# Altium PCB Booster_PA_OUT.PcbDoc (part 1 of 2)
Units mil, origin at the board's own origin, x right, y up, seen from the top; angles counter-clockwise.
Board outline 3129.92 x 1141.73 mil, 2 copper layers (Top Layer, Bottom Layer), stack 42.17 mil thick; 98 components, 62 nets, 277 pads, 322 vias.
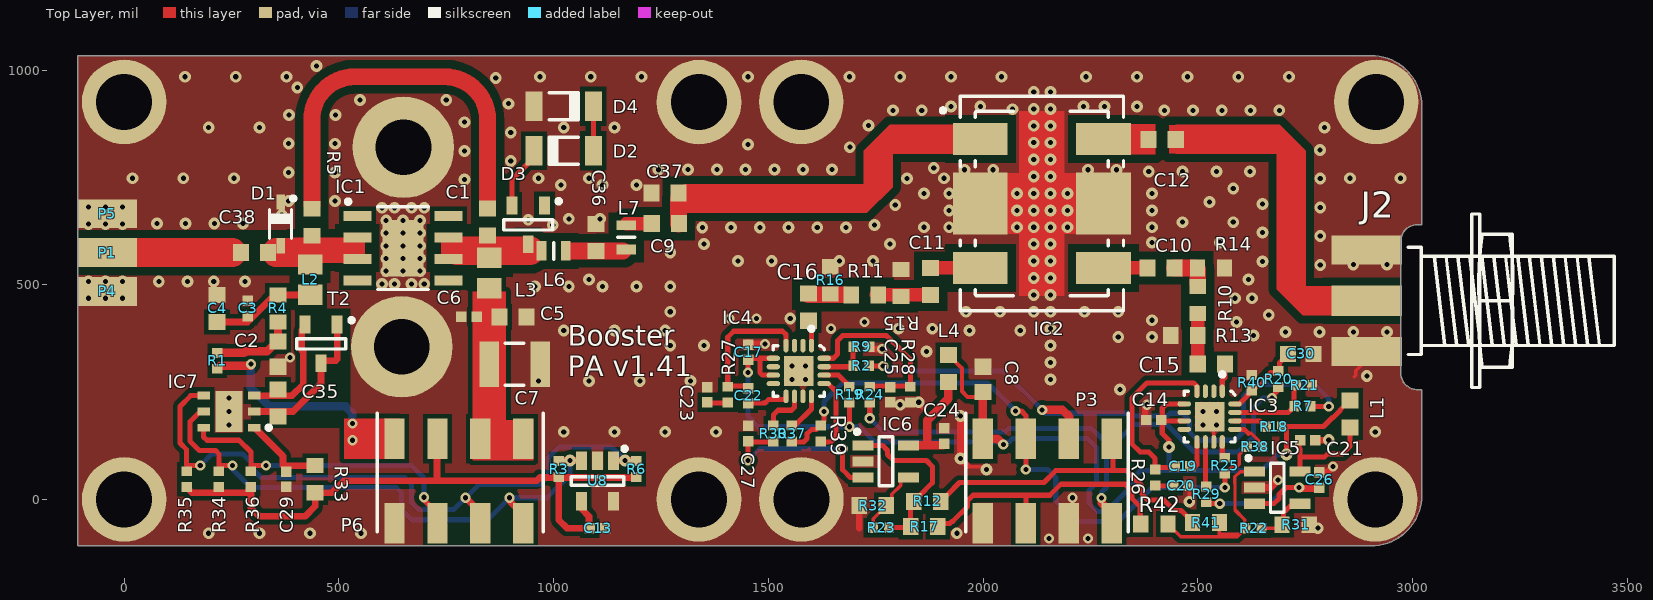
[diagram p0: Top Layer view]
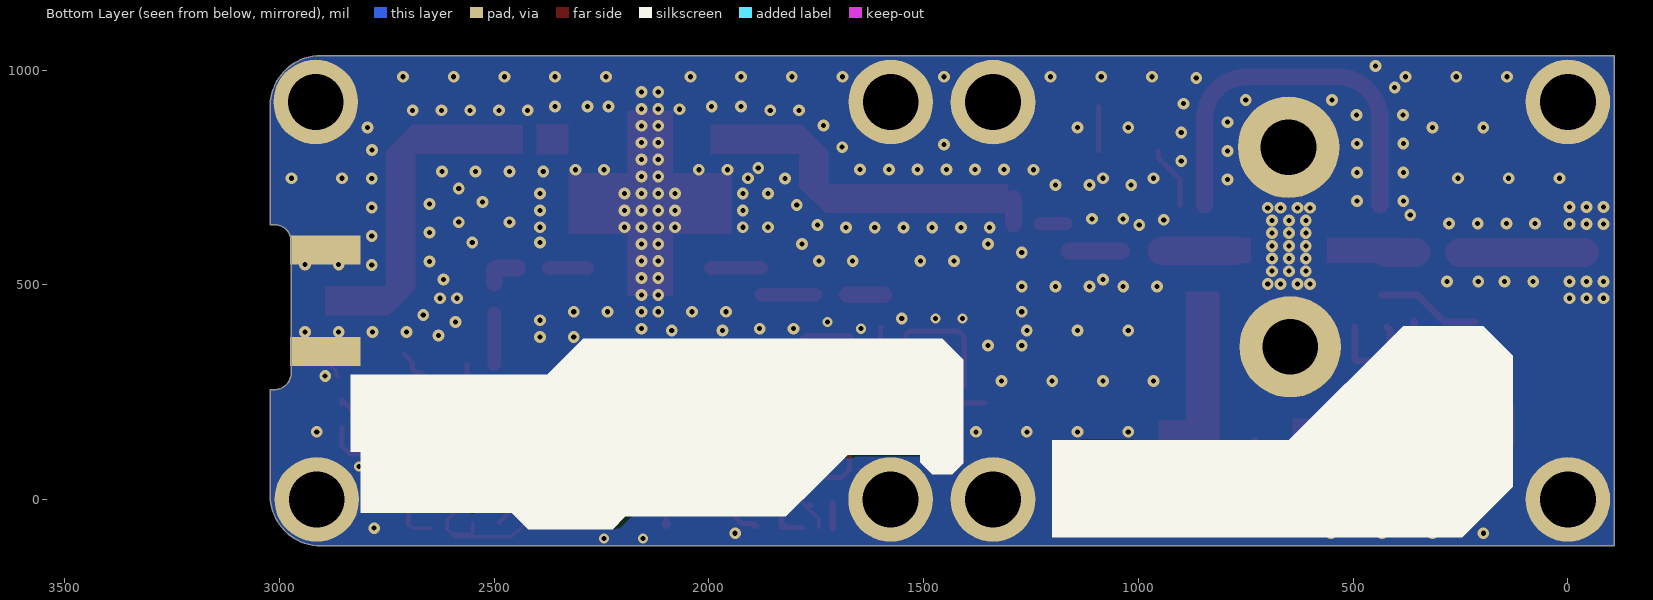
[diagram p1: Bottom Layer view, seen from below]
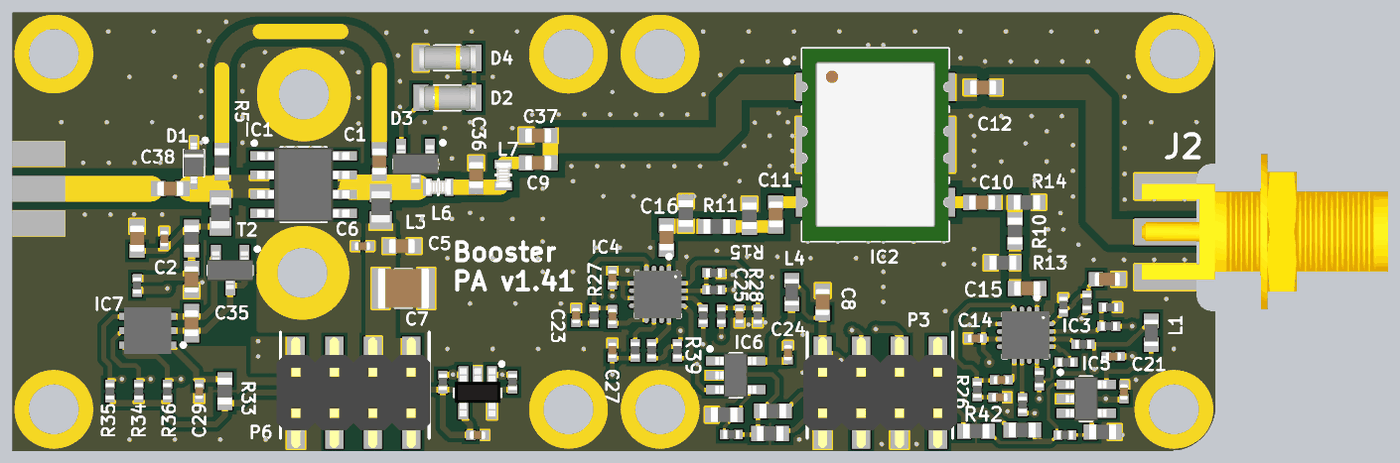
[diagram p2: 3D render of the assembled board from above, using the file's embedded part models]

## Layer stack, top to bottom
Top Solder: solder mask 0.4, Solder Resist, Dk 3.5
Top Layer: signal copper 1.4
Dielectric 1: dielectric 39.37, FR408, Dk 3.67
Bottom Layer: signal copper 1.4
Bottom Solder: solder mask 0.4, Solder Resist, Dk 3.5

## Board outline
-108.27,-108.27 -108.27,1033.46 2903.54,1033.46 cw(c2903.54,915.35) 3021.65,915.35 3021.65,639.76 3011.81,639.76 ccw(c3011.81,600.39) 2972.44,600.39 2972.44,295.28 ccw(c3011.81,295.28) 3011.81,255.91 3021.65,255.91 3021.65,9.84 cw(c2903.54,9.84) 2903.54,-108.27

## Design rules (kind name [scope] priority, off if disabled: settings)
Clearance Clearance_50_Ohm [InNetClass('50_Ohm') vs InNet('GND')] p1: gap=19.68 ignorepadtopadclearanceinfootprint=FALSE except(6: Arc-SMDPad Track-SMDPad SMDPad-SMDPad)
Clearance [All] p2: gap=8 ignorepadtopadclearanceinfootprint=FALSE except(6: Track-Track Track-SMDPad Track-THPad SMDPad-SMDPad SMDPad-THPad SMDPad-Via; 11: Arc-Poly Track-Poly SMDPad-Poly THPad-Poly Via-Poly Fill-Poly Poly-Poly Poly-Region Poly-Text Poly-Hole Region-Region Region-Text Region-Hole)
Height [All] p1: minheight=0 maxheight=1181.1 prefheight=500
HoleSize [All] p1: absolutevalues=TRUE maxlimit=157.48 minlimit=1 maxpercent=80.000 minpercent=20.000
MinimumSolderMaskSliver [All] p1: minsoldermaskwidth=0
PolygonConnect [All] p1: connectstyle=Direct reliefconductorwidth=10 reliefentries=4 polygonreliefangle="90 Angle" airgapwidth=10
RoomDefinition Booster_PA_OUT [InComponentClass('Booster_PA_OUT')] p1 off: confinementstyle=ConfineIn formatcopy=TRUE lockcomponents=FALSE outline 3020.12,1043.31 -3.94,1043.31 -3.94,-88.58 3020.12,-88.58
RoutingVias [All] p1: holewidth=28 width=50 viastyle="Through Hole" minholewidth=28 minwidth=50 maxholewidth=28 maxwidth=50
SilkToSilkClearance [All] p1: silktosilkclearance=0
SolderMaskExpansion [All] p1: expansion=4 istentingtop=FALSE
Width Width_50_Ohm [InNetClass('50_Ohm')] p1: maxlimit=66.93 minlimit=11.81 preferedwidth=66.93 bottomlayer_minwidth=0 bottomlayer_maxwidth=0 bottomlayer_prefwidth=0 minimp=50.000000 maximp=50.000000 favimp=50.000000
Width [All] p2: maxlimit=78.74 minlimit=7.87 preferedwidth=19.68 minimp=50.000000 maximp=50.000000 favimp=50.000000
26 further rules are at their usual default settings.

## Classes and differential pairs
net class 50_Ohm: NetC1_1 NetC1_2 NetC9_1 NetC9_2 NetC10_1 NetC10_2 NetC11_1 NetC11_2 NetC12_1 NetC12_2 NetC15_2 NetC16_2 NetC36_2 NetC38_1 NetC38_2

## Components (designator, comment, footprint, x,y, rotation, side; value= is the part's Value field where it differs from the comment)
C1 "470pF" CAPC1608X87N 846.46,645.67 r270 top
C2 "4.7uF" CAPC1709X95N 358.27,338.58 r90 top
C3 "100nF" CAPC1005X55N 287.4,444.88 r270 top
C4 "680pF" CAPC1608X87N 216.54,444.88 r270 top
C5 "680pF" CAPC1608X87N 905.51,425.2 r180 top
C6 "100nF" CAPC1005X55N 803.15,425.2 r0 top
C7 "4.7uF" CAPC3225X270N 909.45,314.96 r180 top
C8 "4.7uF" CAPC1709X95N 2000,279.53 r270 top
C9 "270pF" CAPC1608X87N 1260.16,642.27 r0 top
C10 "2.2nF" CAPC1608X87N 2414.67,538.98 r180 top
C11 "2.2nF" CAPC1608X87N 1877.95,507.87 r90 top
C12 "2.2nF" CAPC1608X87N 2417.32,838.58 r180 top
C13 "100nF" CAPC1005X55N 1102.36,-66.93 r180 top
C14 "100nF" CAPC1005X55N 2397.64,185.04 r0 top
C15 "2.2nF" CAPC1608X87N 2531.5,314.96 r180 top
C16 "2.2nF" CAPC1608X87N 1593.8,447.66 r90 top
C17 "100nF" CAPC1005X55N 1452.76,342.52 r270 top
C19 "1nF" CAPC1005X55N 2464.57,76.77 r180 top
C20 "100nF" CAPC1005X55N 2460.63,31.5 r0 top
C21 "100nF" CAPC1005X55N 2755.91,137.8 r180 top
C22 "1nF" CAPC1005X55N 1452.98,241.73 r90 top
C23 "100nF" CAPC1005X55N 1358.27,244.09 r90 top
C24 "100nF" CAPC1005X55N 1909.45,147.64 r270 top
C25 "100nF" CAPC1005X55N 1783.46,244.09 r90 top
C26 "10nF" CAPC1005X55N 2783.46,45.5 r270 top
C27 "10nF" CAPC1005X55N 1452.76,153.54 r270 top
C29 "100nF" CAPC1005X55N 377.95,47.24 r90 top
C30 "Undefined" CAPC1608X90N 2740.16,338.96 r180 top
C35 "2.2nF" CAPC1608X87N 358.27,224.41 r90 top
C36 "2.7pF" CAPC1608X87N 1098.43,610.24 r270 top
C37 "0.9pF" CAPC1608X87N 1259.84,713.37 r0 top
C38 "3.3nF" CAPC1608X87N 303.15,574.8 r180 top
D1 "AQ4020-01FTG" SOD2512X110N 364.17,641.73 r270 top
D2 "BZV55-B33" DIOMELF3515N 1023.62,811.61 r0 top
D3 "SZNUP1301ML3T1G" SOT95P240X110-3N 941.02,639.34 r270 top
D4 "BZV55-B33" DIOMELF3515N 1023.62,915.35 r180 top
IC1 "NPTB00004A" SOIC127P610X167-9N-R245X335 649.37,585.24 r0 top
IC2 "SYDC-20-62HP+" MINI-CIRCUITS_AH202-1 2137.1,689.28 r0 top
IC3 "ADL5904ACPZN-R7" QFN50P300X300X80-17N-S175 2527.56,192.91 r270 top
IC4 "ADL5904ACPZN-R7" QFN50P300X300X80-17N-S175 1570.87,299.21 r270 top
IC5 "MCP6291T-E/OT" SOT95P270X145-5N 2685.04,27.56 r0 top
IC6 "MCP6291T-E/OT" SOT95P270X145-5N 1773.62,88.58 r0 top
IC7 "MAX6642ATT94+T" SON95P300X300X80-7N-R160X240 244.09,204.72 r180 top
J2 "SMA" MOLEX_73251-2120 2893.7,462.6 r180 top
L1 "1000R@100MHz" INDC1608X95N 2854.47,199.21 r90 top
L2 "1uH" INDC2113X60N 433.07,511.81 r90 top
L3 "1uH" INDC2113X60N 850.39,527.56 r270 top
L4 "1000R@100MHz" INDC1608X95N 1919.29,305.12 r90 top
L6 "4.7nH" IND_MURATA_LQW18AN_G8 1000,578.74 r0 top
L7 "6.8nH" IND_MURATA_LQW18AN_G8 1169.29,610.24 r90 top
P1 "PAD" PAD_2x3_rect#1 -39.37,501.97 r90 top value=-
P3 "HDR2X4" HDR2X4_SMD 2149.61,43.31 r90 top locked value=-
P4 "PAD" PAD_2x3_rect#2 29.53,452.76 r90 top value=-
P5 "PAD" PAD_2x3_rect#3 88.58,659.45 r90 top value=-
P6 "HDR2X4" HDR2X4_SMD 779.53,43.31 r90 top locked value=-
R1 "0" RESC1005X40N 216.54,322.83 r270 top
R2 "0" RESC1005X40N 1716.54,311.02 r0 top
R3 "10k" RESC1005X40N 1011.81,70.87 r90 top
R4 "39" RESC1608X55N 358.27,444.88 r90 top
R5 "750" RESC1608X55N 437.01,645.67 r90 top
R6 "10k" RESC1005X40N 1192.91,70.87 r90 top
R7 "0" RESC1005X40N 2744.09,216.54 r0 top
R9 "0" RESC1005X40N 1716.95,355.51 r180 top
R10 "71R5" RESC1608X55N 2500,464.57 r90 top
R11 "71R5" RESC1608X55N 1724.41,476.38 r180 top
R12 "Undefined" RESC1608X55N 1870.08,-4.33 r0 top
R13 "46R4" RESC1608X55N 2468.5,381.89 r0 top
R14 "96R5" RESC1608X55N 2530.81,539.37 r180 top
R15 "96R5" RESC1608X55N 1809.44,503.94 r270 top
R16 "46R4" RESC1608X55N 1644.18,510.24 r270 top
R17 "100" RESC1608X55N 1863.06,-63.08 r0 top
R18 "10k" RESC1005X40N 2677.17,169.29 r180 top
R19 "10k" RESC1005X40N 1688.98,244.09 r270 top
R20 "0" RESC1005X40N 2687.01,280.28 r90 top
R21 "0" RESC1005X40N 2747.81,265.75 r180 top
R22 "10k" RESC1005X40N 2629.92,-66.93 r0 top
R23 "10k" RESC1005X40N 1762.46,-65.67 r180 top
R24 "0" RESC1005X40N 1736.22,244.09 r90 top
R25 "0" RESC1005X40N 2562.99,78.74 r90 top
R26 "3R9" RESC1005X40N 2401.57,51.18 r270 top
R27 "3R9" RESC1005X40N 1405.51,244.09 r270 top
R28 "10k" RESC1005X40N 1830.71,244.09 r270 top
R29 "0" RESC1005X40N 2519.68,11.81 r90 top
R30 "0" RESC1005X40N 1511.81,153.54 r90 top
R31 "20k" RESC1608X55N 2728,-59 r180 top
R32 "20k" RESC1608X55N 1743.33,-14.24 r0 top
R33 "39" RESC1608X55N 444.88,47.24 r270 top
R34 "10k" RESC1005X40N 220.47,47.24 r90 top
R35 "10k" RESC1005X40N 145.67,47.24 r90 top
R36 "10k" RESC1005X40N 295.28,47.24 r90 top
R37 "0" RESC1005X40N 1555.12,153.54 r90 top
R38 "0" RESC1005X40N 2633.04,122.42 r0 top
R39 "0" RESC1005X40N 1622.05,153.54 r270 top
R40 "0" RESC1005X40N 2625.98,271.65 r90 top
R41 "100" RESC1608X55N 2519,-54 r0 top
R42 "Undefined" RESC1608X55N 2399,-57 r0 top
T2 "MMBT3906LT1G" SOT95P240X110-3N 458.66,362.2 r270 top
U8 "DNP" SOT23-5_N 1102.36,43.31 r270 top value=24AA01H

## Footprints (in the part's own frame and the unit in brackets; to place one, negate y for a bottom-side part, rotate by r counter-clockwise, add the part's x,y. Pads: shape width x height; smd on the part's side, far side on the other; paste and mask are expansions set on the pad)
CAPC1005X55N [mm] "Capacitor, Non-Polarized, Chip; 1.00mm L X 0.50mm W X 0.70mm H, IPC Medium Density"
  rect 0.62x0.62 smd: 1(-0.45,0) 2(0.45,0)
  body extent -0.52,-0.27 0.53,0.28, height 0.55
CAPC1608X87N [mm] "Chip Capacitor, Body 1.6x0.8mm IPC Medium Density"
  rect 0.95x1 smd: 1(-0.8,0) 2(0.8,0)
  body extent -0.87,-0.47 0.88,0.48, height 0.87
CAPC1608X90N [mm] "Chip Capacitor, Body 1.6x0.8mm IPC Medium Density"
  rect 0.95x0.95 smd: 1(-0.75,0) 2(0.75,0)
  body extent -0.85,-0.45 0.85,0.45, height 0.9
CAPC1709X95N [mm] "Capacitor, non-Polarized, Chip; 1.65mm L X 0.85mm W X 0.95mm H,IPC Medium Density"
  rect 0.95x1 smd: 1(-0.75,0) 2(0.75,0)
  body extent -0.87,-0.47 0.88,0.48, height 0.95
CAPC3225X270N [mm] "Chip Capacitor, Body 3.2x2.5mm, IPC Medium Density"
  rect 1.15x2.7 smd: 1(-1.5,0) 2(1.5,0)
  silkscreen extent -0.55,-1.25 0.55,1.25, body extent -1.7,-1.35 1.7,1.35, height 2.7
DIOMELF3515N [mm] "SOD80C, MELF Diode, 2-Leads, Body 3.5x1.5mm, IPC Medium Density"
  rect 1x1.75 smd: 1(-1.75,0) 2(1.75,0)
  silkscreen extent -0.85,-0.8 0.85,0.8, body extent -1.85,-0.8 1.85,0.8, height 1.6
HDR2X4_SMD [mm]
  rect 2.4x1.2 smd: 1(-2.5,-3.81) 2(2.5,-3.81) 3(-2.5,-1.27) 4(2.5,-1.27) 5(-2.5,1.27) 6(2.5,1.27) 7(-2.5,3.81) 8(2.5,3.81)
  silkscreen extent -3,-4.79 4,4.83, body extent -3.65,-5.08 3.65,5.08, height 9.3
IND_MURATA_LQW18AN_G8 [mm] "SMT inductor 0603, Body Width 0.99mm Body Lenght 1.65mm Height 1mm"
  rect 0.57x1.15 smd: 1(-0.715,0) 2(0.715,0)
  silkscreen extent 0,-0.5 0,0.5, body extent -0.82,-0.49 0.83,0.5, height 1
INDC1608X95N [mm] "Chip Inductor, 2-Leads, EIA 0603, Metric 1608, Body 1.6x0.8mm, IPC Medium Density"
  rect 0.95x1 smd: 1(-0.8,0) 2(0.8,0)
  body extent -0.87,-0.47 0.88,0.48, height 0.95
INDC2113X60N [mm] "Chip Inductor, EIA 0805, Metric 2012, Body 2.1x1.25mm, IPC Medium Density"
  rect 1.2x1.45 smd: 1(-0.9,0) 2(0.9,0)
  body extent -1.05,-0.62 1.05,0.63, height 0.6
MINI-CIRCUITS_AH202-1 [mm] "MINI-CIRCUITS AH202-1 Case, Body 12.7mm L X 9.65mm W X 6.35mm H"
  rect 3.23x1.88 smd: 1(3.643,3.81) 4(3.643,-3.81) 5(-3.643,-3.81) 8(-3.643,3.81)
  rect 3.23x2 smd: 2(3.643,0.83) 3(3.643,-0.83) 6(-3.643,-0.83) 7(-3.643,0.83)
  Top Layer region: -1.335,1.78 -4.825,1.78 -4.825,-1.78 -1.335,-1.78 -1.335,-5.46 1.335,-5.46 1.335,-1.78 4.825,-1.78 4.825,1.78 1.335,1.78 1.335,5.46 -1.335,5.46
  silkscreen extent -5.97,-6.35 4.82,6.35, body extent -4.82,-6.35 4.83,6.35, height 6.35
MOLEX_73251-2120 [mm] "50 Ohm, SMA Edge Mount PCB, With Jam Nut And Lock Washer"
  rect 4.19x1.78 smd: 1(0,0)
  rect 4.19x1.7 smd: 2(0,3) 2(0,-3)
  rect 4.19x1.7 smd far side: 2(0,3) 2(0,-3)
  silkscreen extent -14.64,-5.13 -2.44,5.13, body extent -14.64,-5.13 1.62,5.13, height 5.76
PAD_2x3_rect#1 [mm] "pad pod gniazdka SMA wkrêcane w obudowy"
  rect 1.7x3.5 smd mask+0.03: 1(1.85,0)
PAD_2x3_rect#2 [mm] "pad pod gniazdka SMA wkrêcane w obudowy"
  rect 1.7x3.5 smd mask+0.03: 1(0.8,1.75)
PAD_2x3_rect#3 [mm] "pad pod gniazdka SMA wkrêcane w obudowy"
  rect 1.7x3.5 smd mask+0.03: 1(0.15,3.25)
QFN50P300X300X80-17N-S175 [mm] "QFN, 0.50mm Pitch, Square; 16 Pin, 3.00mm L X 3.00mm W X 0.80mm H Body (w/Thermal Tab 1.75 X 1.75mm),  IPC Medium Density"
  oval 0.8x0.3 smd: 1(-1.5,0.75) 2(-1.5,0.25) 3(-1.5,-0.25) 4(-1.5,-0.75) 9(1.5,-0.75) 10(1.5,-0.25) 11(1.5,0.25) 12(1.5,0.75)
  oval 0.3x0.8 smd: 5(-0.75,-1.5) 6(-0.25,-1.5) 7(0.25,-1.5) 8(0.75,-1.5) 13(0.75,1.5) 14(0.25,1.5) 15(-0.25,1.5) 16(-0.75,1.5)
  rect 1.75x1.75 smd: 17(0,0)
  silkscreen extent -2.62,-1.5 1.5,1.5, body extent -1.57,-1.57 1.58,1.58, height 0.8
RESC1005X40N [mm] "Chip Resistor, EIA 0402, Metric 1005, Body 1.0x0.5mm, IPC Medium Density"
  rect 0.58x0.62 smd: 1(-0.47,0) 2(0.47,0)
  body extent -0.52,-0.27 0.53,0.28, height 0.4
RESC1608X55N [mm] "Chip Resistor, EIA 0603, Metric 1608, Body 1.6x0.8mm, IPC Medium Density"
  rect 0.9x1 smd: 1(-0.8,0) 2(0.8,0)
  body extent -0.87,-0.47 0.88,0.48, height 0.55
SOD2512X110N [mm] "Small Outline Diode (SOD-323), 1.70mm W X 1.25mm L X 1.10mm H body,  IPC Medium Density"
  rect 0.9x0.5 smd: 1(-1.3,0) 2(1.3,0)
  silkscreen extent -1.62,-0.65 0.85,0.88, body extent -1.35,-0.67 1.35,0.68, height 1.1
SOIC127P610X167-9N-R245X335 [mm] "SOIC, 1.27mm pitch; 8 pin, 3.89mm W X 4.90mm L X 1.67mm H body (w/thermal tab 2.45mm X 3.35mm), IPC Medium Density"
  rect 1.65x0.6 smd: 1(-2.7,1.905) 2(-2.7,0.635) 3(-2.7,-0.635) 4(-2.7,-1.905) 5(2.7,-1.905) 6(2.7,-0.635) 7(2.7,0.635) 8(2.7,1.905)
  rect 2.45x3.35 smd: 9(0,0)
  silkscreen extent -3.37,-2.45 1.5,2.87, body extent -3.05,-2.45 3.05,2.45, height 1.67
SON95P300X300X80-7N-R160X240 [mm] "SON, 0.95mm Pitch; 6 Pin, 3.00mm W X 3mm L X 0.80mm H body (w/Thermal Tab 1.6mm x 2.4mm)"
  rect 0.75x0.45 smd: 1(-1.5,0.95) 2(-1.5,0) 3(-1.5,-0.95) 4(1.5,-0.95) 5(1.5,0) 6(1.5,0.95)
  rect 1.6x2.4 smd: 7(0,0)
  silkscreen extent -2.48,0.83 -2.23,1.07, body extent -1.55,-1.55 1.55,1.55, height 0.8
SOT23-5_N [mm] "SOT23, 5-Leads, Body 2.9x1.6mm, Pitch 0.95mm, Lead Span 2.8mm, IPC Medium Density"
  rect 1.1x0.65 smd: 1(-1.2,0.95) 2(-1.2,0) 3(-1.2,-0.95) 4(1.2,-0.95) 5(1.2,0.95)
  silkscreen extent -2.02,-1.55 0.25,1.73, body extent -1.63,-1.5 1.57,1.5, height 1.1
SOT95P240X110-3N [mm] "SOT23 3-Leads, Pitch 0.95mm, Body 1.3x2.9mm, IPC Medium Density"
  rect 1.05x0.65 smd: 1(-1.15,0.95) 2(-1.15,-0.95) 3(1.15,0)
  silkscreen extent -1.52,-1.45 0.3,1.92, body extent -1.25,-1.5 1.25,1.5, height 1.1
SOT95P270X145-5N [mm] "SOT, 0.95mm Pitch; 5 Pin,1.55mm W X 2.90mm L X 1.45mm H body, IPC Medium Density"
  rect 1.25x0.6 smd: 1(-1.35,0.95) 2(-1.35,0) 3(-1.35,-0.95) 4(1.35,-0.95) 5(1.35,0.95)
  silkscreen extent -1.82,-1.45 0.4,1.87, body extent -1.35,-1.45 1.35,1.45, height 1.45

## Part data
C1: "Non-polarised capacitor", Case=0603, Manufacturer=GENERIC, Manufacturer1 ComponentHeight=0.87mm, Manufacturer1 Example=Multicomp, Manufacturer1 Part Number=MCMT18N471F500CT, Manufacturer Part Number=CC0603_470PF_50V_1%_NP0, Tolerance=±1%, Voltage=50V, Author=GK, Component Type=Standard, CreateDate=03.12.2007, HelpURL=\\cern.ch\dfs\Applications\Altium\Datasheets\CC0603_NP0_PHYCOMP.pdf, LatestRevisionDate=03.12.2007, Mounted=Yes, Part Description="SMD Multilayer Chip Ceramic Capacitor", Part Number=CC0603_470PF_50V_1%_NP0, Pin Count=2, Sense=No, SMD=Yes, Socket=No, Status=Preferred, TC=C0G/NP0
C2 C8: library part CC0603_4.7UF_16V_10%_X5R, "Non-polarised capacitor", Case=0603, Manufacturer=GENERIC, Manufacturer1 ComponentHeight=0.95mm, Manufacturer1 Example="TAIYO YUDEN", Manufacturer1 Part Number=EMK107ABJ475KA-T, Tolerance=±10%, Voltage=16V, Author="CERN DEM JLC", Component Type=Standard, CreateDate=16.12.2013, HelpURL=\\cern.ch\dfs\Applications\Altium\Datasheets\CC0603_X7R_TAIYO-YUDEN_HIGH-VALUE.pdf, LatestRevisionDate=16.09.2014, Manufacturer Part Number=CC0603_4.7UF_16V_10%_X5R, Mounted=Yes, Part Description="SMD Multilayer Chip Ceramic Capacitor", Part Number=CC0603_4.7UF_16V_10%_X5R, Pin Count=2, Sense=No, SMD=Yes, Socket=No, Status=None, TC=X5R
C3 C6 C13 C14 C17 C20 C21 C23 C24 C25 C29: library part CC0402_100NF_50V_10%_X7R, "Non-polarised capacitor", Case=0402, Manufacturer=GENERIC, Manufacturer1 ComponentHeight=0.55mm, Manufacturer1 Example=MURATA, Manufacturer1 Part Number=GRM155R71H104KE14D, Tolerance=±10%, Voltage=50V, Author="CERN DEM MR", Component Type=Standard, CreateDate=30/06/2017, HelpURL=\\cern.ch\dfs\Applications\Altium\Datasheets\CC0402_MURATA_GRM155R71H104KE14D.pdf, LatestRevisionDate=30/06/2017, Manufacturer Part Number=CC0402_100NF_50V_10%_X7R, Mounted=Yes, Part Description="SMD Multilayer Chip Ceramic Capacitor", Part Number=CC0402_100NF_50V_10%_X7R, Pin Count=2, Sense=No, SMD=Yes, Socket=No, Status=None, TC=X7R
C4 C5: library part CC0603_680PF_50V_5%_NP0, "Non-polarised capacitor", Case=0603, Manufacturer=GENERIC, Manufacturer1 ComponentHeight=0.87mm, Manufacturer1 Example=PHYCOMP, Manufacturer1 Part Number=223886715681, Tolerance=±5%, Voltage=50V, Author="CERN DEM JLC", Component Type=Standard, CreateDate=03.12.2007, HelpURL=\\cern.ch\dfs\Applications\Altium\Datasheets\CC0603_NP0_PHYCOMP.pdf, LatestRevisionDate=03.12.2007, Manufacturer Part Number=CC0603_680PF_50V_5%_NP0, Mounted=Yes, Part Description="SMD Multilayer Chip Ceramic Capacitor", Part Number=CC0603_680PF_50V_5%_NP0, Pin Count=2, Sense=No, SMD=Yes, Socket=No, Status=Preferred, TC=C0G/NP0
C7: library part CC1210_4.7UF_50V_10%_X7R, "Non-polarised capacitor", Case=1210, Manufacturer=GENERIC, Manufacturer1 ComponentHeight=2.7mm, Manufacturer1 Example=KEMET, Manufacturer1 Part Number=C1210C475K5RAC, Tolerance=±10%, Voltage=50V, Author="CERN DEM JLC", Component Type=Standard, CreateDate=01.04.2009, HelpURL=\\cern.ch\dfs\Applications\Altium\Datasheets\CC1210_X7R_KEMET.pdf, LatestRevisionDate=05.05.2009, Manufacturer Part Number=CC1210_4.7UF_50V_10%_X7R, Mounted=Yes, Part Description="SMD Multilayer Chip Ceramic Capacitor", Part Number=CC1210_4.7UF_50V_10%_X7R, Pin Count=2, Sense=No, SMD=Yes, Socket=No, Status=None, TC=X7R
C9: "Non-polarised capacitor", Case=0603, Manufacturer=GENERIC, Manufacturer1 ComponentHeight=0.87mm, Manufacturer1 Example=Kemet, Manufacturer1 Part Number=C0603C271F5GACTU, Manufacturer Part Number=CC0603_270PF_50V_1%_NP0, Tolerance=±1%, Voltage=50V, Author=GK, Component Type=Standard, CreateDate=03.12.2007, HelpURL=\\cern.ch\dfs\Applications\Altium\Datasheets\CC0603_NP0_PHYCOMP.pdf, LatestRevisionDate=03.12.2007, Mounted=Yes, Part Description="SMD Multilayer Chip Ceramic Capacitor", Part Number=CC0603_270PF_50V_1%_NP0, Pin Count=2, Sense=No, SMD=Yes, Socket=No, Status=Preferred, TC=C0G/NP0
C10 C11 C12 C15 C16 C35: library part CC0603_2.2NF_50V_5%_C0G, "Non-polarised capacitor", Case=0603, Manufacturer=GENERIC, Manufacturer1 ComponentHeight=0.9mm, Manufacturer1 Example=TDK, Manufacturer1 Part Number=C1608C0G1H222J080AA, Tolerance=±5%, Voltage=50V, Author="CERN DEM JMW", Component Type=Standard, CreateDate=23.06.2014, HelpURL=\\cern.ch\dfs\Applications\Altium\Datasheets\CC0603_C0G_TDK_C.pdf, LatestRevisionDate=23.06.2014, Manufacturer Part Number=CC0603_2.2NF_50V_5%_C0G, Mounted=Yes, Part Description="SMD Multilayer Chip Ceramic Capacitor", Part Number=CC0603_2.2NF_50V_5%_C0G, Pin Count=2, Sense=No, SMD=Yes, Socket=No, Status=Preferred, TC=C0G/NP0
C19 C22: library part CC0402_1NF_50V_10%_X7R, "Non-polarised capacitor", Case=0402, Manufacturer=GENERIC, Manufacturer1 ComponentHeight=0.55mm, Manufacturer1 Example=PHYCOMP, Manufacturer1 Part Number=223858715623, Tolerance=±10%, Voltage=50V, Author="CERN DEM JLC", Component Type=Standard, CreateDate=03.12.2007, HelpURL=\\cern.ch\dfs\Applications\Altium\Datasheets\CC0402_X7R_PHYCOMP.pdf, LatestRevisionDate=03.12.2007, Manufacturer Part Number=CC0402_1NF_50V_10%_X7R, Mounted=Yes, Part Description="SMD Multilayer Chip Ceramic Capacitor", Part Number=CC0402_1NF_50V_10%_X7R, Pin Count=2, Sense=No, SMD=Yes, Socket=No, Status="Not Recommended", TC=X7R
C26 C27: library part CC0402_10NF_25V_10%_X7R, "Non-polarised capacitor", Case=0402, Manufacturer=GENERIC, Manufacturer1 ComponentHeight=0.55mm, Manufacturer1 Example=TDK, Manufacturer1 Part Number=C1005X7R1E103KT, Tolerance=±10%, Voltage=25V, Author="CERN DEM JLC", Component Type=Standard, CreateDate=25.10.2012, HelpURL=\\cern.ch\dfs\Applications\Altium\Datasheets\CC0402_X7R_TDK_C.pdf, LatestRevisionDate=25.10.2012, Manufacturer Part Number=CC0402_10NF_25V_10%_X7R, Mounted=Yes, Part Description="SMD Multilayer Chip Ceramic Capacitor", Part Number=CC0402_10NF_25V_10%_X7R, Pin Count=2, Sense=No, SMD=Yes, Socket=No, Status=Preferred, TC=X7R
C30: library part CC0603_NO-VALUE, "Non-polarised capacitor", Case=0603, Manufacturer1 ComponentHeight=0.9mm, Author="CERN DEM MR", Component Type=Standard, CreateDate=22.11.2016, HelpURL=Undefined, LatestRevisionDate=22.11.2016, Manufacturer=Undefined, Manufacturer Part Number=CC0603_NO-VALUE, Mounted=No, Part Description="Reserved Footprint For 0603(1608) Chip Ceramic Capacitor", Part Number=CC0603_NO-VALUE, Pin Count=2, Sense=No, SMD=Yes, Socket=No, Status=None
C36: library part CC0603_2.7PF_50V_0.25PF_NP0, "Non-polarised capacitor", Case=0603, Manufacturer=GENERIC, Manufacturer1 ComponentHeight=0.87mm, Manufacturer1 Example=PHYCOMP, Manufacturer1 Part Number=223886715278, Tolerance=±0.25pF, Voltage=50V, Author="CERN DEM JLC", Component Type=Standard, CreateDate=03.12.2007, HelpURL=\\cern.ch\dfs\Applications\Altium\Datasheets\CC0603_NP0_PHYCOMP.pdf, LatestRevisionDate=03.12.2007, Manufacturer Part Number=CC0603_2.7PF_50V_0.25PF_NP0, Mounted=Yes, Part Description="SMD Multilayer Chip Ceramic Capacitor", Part Number=CC0603_2.7PF_50V_0.25PF_NP0, Pin Count=2, Sense=No, SMD=Yes, Socket=No, Status=Preferred, TC=C0G/NP0
C37: "Non-polarised capacitor", Case=0603, Manufacturer=GENERIC, Manufacturer1 ComponentHeight=0.87mm, Manufacturer1 Example=AVX, Manufacturer1 Part Number=ML03510R9AAT2A, Manufacturer Part Number=CC0603_0.9PF_50V_0.05PF_NP0, Tolerance=±0.05pF, Voltage=50V, Author=GK, Component Type=Standard, CreateDate=03.12.2007, HelpURL=\\cern.ch\dfs\Applications\Altium\Datasheets\CC0603_NP0_PHYCOMP.pdf, LatestRevisionDate=03.12.2007, Mounted=Yes, Part Description="SMD Multilayer Chip Ceramic Capacitor", Part Number=CC0603_0.9PF_50V_0.05PF_NP0, Pin Count=2, Sense=No, SMD=Yes, Socket=No, Status=Preferred, TC=C0G/NP0
C38: library part CC0603_3.3NF_50V_5%_C0G, "Non-polarised capacitor", Case=0603, Manufacturer=GENERIC, Manufacturer1 ComponentHeight=0.9mm, Manufacturer1 Example=TDK, Manufacturer1 Part Number=C1608C0G1H332J080AA, Tolerance=±5%, Voltage=50V, Author="CERN DEM MR", Component Type=Standard, CreateDate=02.11.2016, HelpURL=\\cern.ch\dfs\Applications\Altium\Datasheets\CC0603_C0G_TDK_C.pdf, LatestRevisionDate=02.11.2016, Manufacturer Part Number=CC0603_3.3NF_50V_5%_C0G, Mounted=Yes, Part Description="SMD Multilayer Chip Ceramic Capacitor", Part Number=CC0603_3.3NF_50V_5%_C0G, Pin Count=2, Sense=No, SMD=Yes, Socket=No, Status=Preferred, TC=C0G/NP0
D1: "4V Transient Voltage Suppressor Diode (Uni-Directional)", Case=SOD323, Manufacturer=Littlefuse, Power=735W, Voltage=4V, Author=GK, Bonding=No, Component Type=Standard, ComponentHeight=1.1mm, CreateDate=28.08.2012, Device=AQ4020-01FTG, HelpURL=\\cern.ch\dfs\Applications\Altium\Datasheets\PESD5V0S1UA.pdf, LatestRevisionDate=18.09.2013, Manufacturer Part Number=AQ4020-01FTG, Mounted=Yes, PackageDescription="Small Outline Diode (SOD-323), 1.70mm W X 1.25mm L X 1.10mm H body,  IPC Medium Density", Part Description="Unidirectional ESD Protection for Transient Voltage Suppression", Part Number=AQ4020-01FTG, Pin Count=2, PressFit=No, Sense=No, SMD=Yes, Socket=No
D2 D4: "Zener Diode", Case=SOD-80C, Manufacturer=NEXPERIA, Power=500mW, Voltage=33V, Author="CERN DEM JLC", Bonding=No, Component Type=Standard, ComponentHeight=1.6mm, CreateDate=25.07.2012, Device=BZV55-B33, HelpURL=\\cern.ch\dfs\Applications\Altium\Datasheets\BZV55.pdf, LatestRevisionDate=22.01.2018, Manufacturer Part Number=BZV55-B33, Mounted=Yes, PackageDescription="SOD80C, MELF Diode, 2-Leads, Body 3.5x1.5mm, IPC Medium Density", Part Description="Voltage Regulator Diode", Part Number=BZV55-B33, Pin Count=2, PressFit=No, Sense=No, SMD=Yes, Socket=No
D3: "Low Capacitance Diode Array for ESD Protection in a Single Data Line", Case=SOT23, Manufacturer=ONSEMI, Power=215mA, Voltage=70V, Author=GK, Bonding=No, Component Type=Standard, ComponentHeight=1.1mm, CreateDate=18.01.2010, Device=SZNUP1301ML3T1G, HelpURL=\\cern.ch\dfs\Applications\Altium\Datasheets\BAR66.pdf, LatestRevisionDate=05.10.2010, Manufacturer Part Number=SZNUP1301ML3T1G, Mounted=Yes, PackageDescription="SOT23 3-Leads, Pitch 0.95mm - Body 1.3x2.9mm, IPC Medium Density", Part Description="Low Capacitance Diode Array for ESD Protection in a Single Data Line", Part Number=SZNUP1301ML3T1G, Pin Count=3, PressFit=No, Sense=No, SMD=Yes, Socket=No
IC1: "GaN Wideband Transistor 28V, 5W, DC - 6GHz", Case=SOIC8, Manufacturer=MACOM, Author="CERN DEM BC", Bonding=No, ComponentHeight=1.67mm, Component Type=Standard, CreateDate=23.08.2019, Device=NPTB00004A, HelpURL=\\cern.ch\dfs\Applications\Altium\Datasheets\NPTB00004A.pdf, LatestRevisionDate=23.08.2019, Manufacturer Part Number=NPTB00004A, Mounted=Yes, PackageDescription="SOIC, 1.27mm pitch; 8 pin, 3.89mm W X 4.90mm L X 1.67mm H body (w/thermal tab 2.45mm X 3.35mm), IPC Medium Density", Part Description="GaN Wideband Transistor 28V, 5W, DC - 6GHz", Part Number=NPTB00004A, Pin Count=9, PressFit=No, Sense=No, SMD=Yes, Socket=No
IC2: "50Ohm, 10 to 540MHz, 25W, 20dB Bi-Directional Coupler", Manufacturer=MINI-CIRCUITS, Author="CERN DEM BC", Bonding=No, ComponentHeight=6.35mm, Component Type=Standard, CreateDate=26.08.2019, Device=SYDC-20-62HP+, HelpURL=\\cern.ch\dfs\Applications\Altium\Datasheets\SYDC-20-62HP+.pdf, LatestRevisionDate=26.08.2019, Manufacturer Part Number=SYDC-20-62HP+, Mounted=Yes, PackageDescription="MINI-CIRCUITS AH202-1 Case, Body 12.7mm L X 9.65mm W X 6.35mm H", Part Description="50Ohm, 10 to 540MHz, 25W, 20dB Bi-Directional Coupler", Part Number=SYDC-20-62HP+, Pin Count=8, PressFit=No, Sense=No, SMD=Yes, Socket=No
IC3 IC4: "DC to 6 GHz, 45 dB TruPwr Detector With Envelope Threshold Detection", Case=QFN16, Manufacturer="ANALOG DEVICES", Author="CERN DEM MR", Bonding=No, ComponentHeight=0.8mm, Component Type=Standard, CreateDate=26.09.2017, Device=ADL5904ACPZN-R7, HelpURL=\\cern.ch\dfs\Applications\Altium\Datasheets\ADL5904ACPZN-R7.pdf, LatestRevisionDate=26.09.2017, Manufacturer Part Number=ADL5904ACPZN-R7, Mounted=Yes, PackageDescription="QFN, 0.50mm Pitch, Square; 16 Pin, 3.00mm L X 3.00mm W X 0.80mm H Body (w/Thermal Tab 1.75 X 1.75mm),  IPC Medium Density", Part Description="DC to 6 GHz, 45 dB TruPwr Detector With Envelope Threshold Detection", Part Number=ADL5904ACPZN-R7, Pin Count=17, PressFit=No, Sense=No, SMD=Yes, Socket=No
IC5 IC6: "Operational Amplifier", Case=SOT23-5, Manufacturer="MICROCHIP TECHNOLOGY", Author="CERN DEM BC", Bonding=No, ComponentHeight=1.45mm, Component Type=Standard, CreateDate=22.08.2019, Device=MCP6291T-E/OT, HelpURL=\\cern.ch\dfs\Applications\Altium\Datasheets\MCP6291T-E-OT.pdf, LatestRevisionDate=22.08.2019, Manufacturer Part Number=MCP6291T-E/OT, Mounted=Yes, PackageDescription="SOT, 0.95mm pitch; 5 pin, 1.55mm W X 2.90mm L X 1.45mm H body, IPC Medium Density", Part Description="1.0mA, 10 MHz Rail-to-Rail Operational Amplifier", Part Number=MCP6291T-E/OT, Pin Count=5, PressFit=No, Sense=No, SMD=Yes, Socket=No
IC7: "±1°C, SMBus-Compatible Remote/Local Temperature Sensor with Overtemperature Alarm", Case=SON6, Manufacturer=MAXIM, Author="CERN DEM JLC", Bonding=No, ComponentHeight=0.8mm, Component Type=Standard, CreateDate=26.11.2013, Device=MAX6642ATT94+T, HelpURL=\\cern.ch\dfs\Applications\Altium\Datasheets\MAX6642ATT94+T.pdf, LatestRevisionDate=26.11.2013, Manufacturer Part Number=MAX6642ATT94+T, Mounted=Yes, PackageDescription="SON, 0.95mm Pitch; 6 Pin, 3.00mm W X 3mm L X 0.80mm H body (w/Thermal Tab 1.6mm x 2.4mm)", Part Description="0°C to +125°C, ±1°C, SMBus-Compatible Remote/Local Temperature Sensor with Overtemperature Alarm (Address 1001 010)", Part Number=MAX6642ATT94+T, Pin Count=7, PressFit=No, Sense=No, SMD=Yes, Socket=No
J2: "50 Ohm, SMA Edge Mount PCB, With Jam Nut And Lock Washer", Manufacturer=MOLEX, Manufacturer Part Number=73251-2120, Part Number=MOLEX_73251-2120, Author="CERN DEM JLC", ComponentHeight=5.75mm, Component Type=Standard, CreateDate=26.10.2016, Family=SMA, HelpURL=\\cern.ch\dfs\Applications\Altium\Datasheets\MOLEX_73251-2121.pdf, LatestRevisionDate=26.10.2016, Mounted=Yes, Part Description="50 Ohm, SMA Edge Mount PCB, With Jam Nut And Lock Washer", Pin Count=5, PressFit=No, Sense=No, SMD=Yes, Socket=No, Status=None
L1 L4: library part IND0603_MURATA_BLM18HE102SN1, Case=0603, Manufacturer=MURATA, Manufacturer Part Number=BLM18HE102SN1, Power=600mA, Resistance=0.35R, Tolerance=±25%, Author="CERN DEM JLC", ComponentHeight=0.95mm, Component Type=Standard, CreateDate=09.12.2013, HelpURL=\\cern.ch\dfs\Applications\Altium\Datasheets\IND0603_MURATA_BLM18H.pdf, LatestRevisionDate=25.10.2018, Mounted=Yes, Part Description="SMD EMIFIL Suppression Chip Ferrite Bead", Part Number=IND0603_MURATA_BLM18HE102SN1, Pin Count=2, Sense=No, SMD=Yes, Socket=No, Status=None
L2 L3: library part IND0805_1UH_20%_WURTH_74479773210, "Inductor", Case=0805, Manufacturer="WURTH ELEKTRONIK", Manufacturer Part Number=74479773210, Power=800mA, Resistance=0.18R, Tolerance=±20%, Author="CERN DEM BC", ComponentHeight=0.6mm, Component Type=Standard, CreateDate=26.08.2019, HelpURL=\\cern.ch\dfs\Applications\Altium\Datasheets\IND_WURTH_WE-PMI_74479773210.pdf, LatestRevisionDate=26.08.2019, Mounted=Yes, Part Description="Power Multilayer Inductor (WE-PMI Series)", Part Number=IND0805_1UH_20%_WURTH_74479773210, Pin Count=2, Sense=No, SMD=Yes, Socket=No, Status=None
L6: library part IND0603_4.7NH_2%_MURATA_LQW18AN4N7G8Z, "Inductor With Core", Case=0603, Manufacturer=MURATA, Manufacturer Part Number=LQW18AN4N7G8Z, Power=1.5A, Resistance=0R054, Tolerance=±2%, Author="CERN DEM BC", ComponentHeight=1mm, Component Type=Standard, CreateDate=26.08.2019, HelpURL=\\cern.ch\dfs\Applications\Altium\Datasheets\IND_MURATA_LQW18AN4N7G8Z.pdf, LatestRevisionDate=26.08.2019, Mounted=Yes, Part Description="Wirw Wond RF Inductor For Automotive", Part Number=IND0603_4.7NH_2%_MURATA_LQW18AN4N7G8Z, Pin Count=2, Sense=No, SMD=Yes, Socket=No, Status=None
L7: library part IND0603_6.8NH_2%_MURATA_LQW18AN6N8G8Z, "Inductor With Core", Case=0603, Manufacturer=MURATA, Manufacturer Part Number=LQW18AN6N8G8Z, Power=1.9A, Resistance=0R04, Tolerance=±2%, Author="CERN DEM BC", ComponentHeight=1mm, Component Type=Standard, CreateDate=26.08.2019, HelpURL=\\cern.ch\dfs\Applications\Altium\Datasheets\IND_MURATA_LQW18AN6N8G8Z.pdf, LatestRevisionDate=26.08.2019, Mounted=Yes, Part Description="Wirw Wond RF Inductor For Automotive", Part Number=IND0603_6.8NH_2%_MURATA_LQW18AN6N8G8Z, Pin Count=2, Sense=No, SMD=Yes, Socket=No, Status=None
P1 P4 P5: Manufacturer=-, Generic=no, Manufacturer Part Number=-, Mounting type=-, Package=-, Remarks="PCB PAD", Supplier 1=-, Supplier 2=-, Supplier 3=-, Supplier Part Number 1=-, Supplier Part Number 2=-, Supplier Part Number 3=-
P3 P6: "Header, 4-Pin, Dual Row", Manufacturer=-, Package="2x4 pin SMD", Supplier Part Number 1=ZL264-8DG, Generic=yes, Manufacturer Part Number=-, Mounting type=SMT, Remarks="ordinary goldpin socket", Supplier 1=TME, Supplier 2=-, Supplier 3=-, Supplier Part Number 2=-, Supplier Part Number 3=-
R1 R2 R7 R9 R20 R21 R24 R25 R29 R30 R37 R38 R39 R40: library part R0402_0R_JUMPER, "Resistor", Case=0402, Manufacturer=GENERIC, Manufacturer1 ComponentHeight=0.4mm, Manufacturer1 Example="YAGEO PHYCOMP", Manufacturer1 Part Number=232270591001L, Author="CERN DEM JLC", Component Type=Standard, CreateDate=03.12.2007, HelpURL=\\cern.ch\dfs\Applications\Altium\Datasheets\R0402_Phycomp_RC0402.pdf, LatestRevisionDate=17.10.2012, Manufacturer Part Number=R0402_0R_JUMPER, Mounted=Yes, Part Description="1A (0.05R Max DC Resistance) Zero Ohm Jumper", Part Number=R0402_0R_JUMPER, Pin Count=2, PressFit=No, Sense=No, SMD=Yes, Socket=No, Status="Not Recommended"
R3 R6 R18 R19 R22 R23 R28 R34 R35 R36: library part R0402_10k_1%_0.0625W_100PPM, "Resistor - 1%", Case=0402, Manufacturer=GENERIC, Manufacturer1 ComponentHeight=0.4mm, Manufacturer1 Example="YAGEO PHYCOMP", Manufacturer1 Part Number=232270671003L, Manufacturer Part Number=R0402_10K_1%_0.0625W_100PPM, Power=0.0625W, Tolerance=±1%, Author="CERN DEM JLC", Component Type=Standard, CreateDate=03.12.2007, HelpURL=\\cern.ch\dfs\Applications\Altium\Datasheets\R0402_Phycomp_RC0402.pdf, LatestRevisionDate=17.10.2012, Mounted=Yes, Part Description="General Purpose Thick Film Chip Resistor", Part Number=R0402_10K_1%_0.0625W_100PPM, Pin Count=2, PressFit=No, Sense=No, SMD=Yes, Socket=No, Status="Not Recommended", TC=±100ppm/°C
R4 R33: library part R0603_39R_1%_0.1W_100PPM, "Resistor - 1%", Case=0603, Manufacturer=GENERIC, Manufacturer1 ComponentHeight=0.55mm, Manufacturer1 Example="NIC COMPONENT", Manufacturer1 Part Number=NRC06F39R0TRF, Power=0.1W, Tolerance=±1%, Author="CERN DEM JLC", Component Type=Standard, CreateDate=03.12.2007, HelpURL=\\cern.ch\dfs\Applications\Altium\Datasheets\R0603_NIC_NRC.pdf, LatestRevisionDate=13.03.2008, Manufacturer Part Number=R0603_39R_1%_0.1W_100PPM, Mounted=Yes, Part Description="General Purpose Thick Film Chip Resistor", Part Number=R0603_39R_1%_0.1W_100PPM, Pin Count=2, PressFit=No, Sense=No, SMD=Yes, Socket=No, Status=Preferred, TC=±100ppm/°C
R5: library part R0603_750R_1%_0.1W_100PPM, "Resistor - 1%", Case=0603, Manufacturer=GENERIC, Manufacturer1 ComponentHeight=0.55mm, Manufacturer1 Example="NIC COMPONENT", Manufacturer1 Part Number=NRC06F7500TRF, Power=0.1W, Tolerance=±1%, Author="CERN DEM JLC", Component Type=Standard, CreateDate=03.12.2007, HelpURL=\\cern.ch\dfs\Applications\Altium\Datasheets\R0603_NIC_NRC.pdf, LatestRevisionDate=13.03.2008, Manufacturer Part Number=R0603_750R_1%_0.1W_100PPM, Mounted=Yes, Part Description="General Purpose Thick Film Chip Resistor", Part Number=R0603_750R_1%_0.1W_100PPM, Pin Count=2, PressFit=No, Sense=No, SMD=Yes, Socket=No, Status=Preferred, TC=±100ppm/°C
R10 R11: library part R0603_71R5_1%_0.1W_100PPM, "Resistor - 1%", Case=0603, Manufacturer=GENERIC, Manufacturer1 ComponentHeight=0.50mm, Manufacturer1 Example=VISHAY, Manufacturer1 Part Number=CRCW060371R5FKEA, Power=0.1W, Tolerance=±1%, Author="CERN DEM JLC", Component Type=Standard, CreateDate=11.12.2013, HelpURL="\\cern.ch\dfs\Applications\Altium\Datasheets\R0603_VISHAY_CRCW e3.pdf", LatestRevisionDate=11.12.2013, Manufacturer Part Number=R0603_71R5_1%_0.1W_100PPM, Mounted=Yes, Part Description="General Purpose Thick Film Chip Resistor", Part Number=R0603_71R5_1%_0.1W_100PPM, Pin Count=2, PressFit=No, Sense=No, SMD=Yes, Socket=No, Status=Preferred, TC=±100ppm/°C
R12 R42: library part R0603_NO-VALUE, "Resistor", Case=0603, Author="CERN DEM JLC", Component Type=Standard, CreateDate=03.12.2007, HelpURL=Undefined, LatestRevisionDate=13.03.2008, Manufacturer=Undefined, Manufacturer1 ComponentHeight=Undefined, Manufacturer1 Example=Undefined, Manufacturer1 Part Number=Undefined, Manufacturer Part Number=R0603_NO-VALUE, Mounted=No, Part Description="Reserved Footprint For a 0603 (1608) Chip Resistor", Part Number=R0603_NO-VALUE, Pin Count=2, PressFit=No, Sense=No, SMD=Yes, Socket=No, Status=None
R13 R16: library part R0603_46R4_0.1%_0.063W_10PPM, "Resistor - 0.1%", Case=0603, Manufacturer=GENERIC, Manufacturer1 ComponentHeight=0.5mm, Manufacturer1 Example="TYCO HOLSWORTHY", Manufacturer1 Part Number=RN73C1J46R4BTDF, Power=0.063W, Tolerance=±0.1%, Author="CERN DEM JLC", Component Type=Standard, CreateDate=03.12.2007, HelpURL=\\cern.ch\dfs\Applications\Altium\Datasheets\R0603_Tyco_RN73.pdf, LatestRevisionDate=13.03.2008, Manufacturer Part Number=R0603_46R4_0.1%_0.063W_10PPM, Mounted=Yes, Part Description="Thin Film Chip Resistor", Part Number=R0603_46R4_0.1%_0.063W_10PPM, Pin Count=2, PressFit=No, Sense=No, SMD=Yes, Socket=No, Status="Not Recommended", TC=±10ppm
R14 R15: "Resistor - 0.5%", Case=0603, Manufacturer=GENERIC, Manufacturer1 ComponentHeight=0.55mm, Manufacturer1 Example=Yaego, Manufacturer1 Part Number=RT0603DRE0796R5L, Manufacturer Part Number=R0603_96R5_0.5%_0.1W_50PPM, Power=0.1W, Tolerance=±0.5%, Author=GK, Component Type=Standard, CreateDate=03.12.2007, HelpURL=\\cern.ch\dfs\Applications\Altium\Datasheets\R0603_NIC_NRC.pdf, LatestRevisionDate=13.03.2008, Mounted=Yes, Part Description="General Purpose Thick Film Chip Resistor", Part Number=R0603_96R5_0.5%_0.1W_50PPM, Pin Count=2, PressFit=No, Sense=No, SMD=Yes, Socket=No, Status=Preferred, TC=±50ppm/°C
R17 R41: library part R0603_100R_1%_0.1W_100PPM, "Resistor - 1%", Case=0603, Manufacturer=GENERIC, Manufacturer1 ComponentHeight=0.55mm, Manufacturer1 Example="NIC COMPONENT", Manufacturer1 Part Number=NRC06F4700TRF, Power=0.1W, Tolerance=±1%, Author="CERN DEM JLC", Component Type=Standard, CreateDate=03.12.2007, HelpURL=\\cern.ch\dfs\Applications\Altium\Datasheets\R0603_NIC_NRC.pdf, LatestRevisionDate=13.03.2008, Manufacturer Part Number=R0603_100R_1%_0.1W_100PPM, Mounted=Yes, Part Description="General Purpose Thick Film Chip Resistor", Part Number=R0603_100R_1%_0.1W_100PPM, Pin Count=2, PressFit=No, Sense=No, SMD=Yes, Socket=No, Status=Preferred, TC=±100ppm/°C
R26 R27: library part R0402_3R9_1%_0.0625W_200PPM, "Resistor - 1%", Case=0402, Manufacturer=GENERIC, Manufacturer1 ComponentHeight=0.4mm, Manufacturer1 Example="YAGEO PHYCOMP", Manufacturer1 Part Number=232270673908L, Power=0.0625W, Tolerance=±1%, Author="CERN DEM JLC", Component Type=Standard, CreateDate=03.12.2007, HelpURL=\\cern.ch\dfs\Applications\Altium\Datasheets\R0402_Phycomp_RC0402.pdf, LatestRevisionDate=17.10.2012, Manufacturer Part Number=R0402_3R9_1%_0.0625W_200PPM, Mounted=Yes, Part Description="General Purpose Thick Film Chip Resistor", Part Number=R0402_3R9_1%_0.0625W_200PPM, Pin Count=2, PressFit=No, Sense=No, SMD=Yes, Socket=No, Status="Not Recommended", TC=±200ppm/°C
R31 R32: library part R0603_20K_1%_0.1W_100PPM, "Resistor - 1%", Case=0603, Manufacturer=GENERIC, Manufacturer1 ComponentHeight=0.55mm, Manufacturer1 Example="NIC COMPONENT", Manufacturer1 Part Number=NRC06F2002TRF, Power=0.1W, Tolerance=±1%, Author="CERN DEM JLC", Component Type=Standard, CreateDate=03.12.2007, HelpURL=\\cern.ch\dfs\Applications\Altium\Datasheets\R0603_NIC_NRC.pdf, LatestRevisionDate=13.03.2008, Manufacturer Part Number=R0603_20K_1%_0.1W_100PPM, Mounted=Yes, Part Description="General Purpose Thick Film Chip Resistor", Part Number=R0603_20K_1%_0.1W_100PPM, Pin Count=2, PressFit=No, Sense=No, SMD=Yes, Socket=No, Status=Preferred, TC=±100ppm/°C
T2: "PNP Transistor", Case=SOT23-3, Manufacturer="ON SEMICONDUCTOR", Author="CERN DEM JLC", Bonding=No, ComponentHeight=1.1mm, Component Type=Standard, CreateDate=29.03.2012, Device=MMBT3906LT1G, HelpURL=\\cern.ch\dfs\Applications\Altium\Datasheets\MMBT3906LT1G.pdf, LatestRevisionDate=29.03.2012, Manufacturer Part Number=MMBT3906LT1G, Mounted=Yes, PackageDescription="SOT23 3-Leads, Pitch 0.95mm - Body 1.4x3mm, IPC Medium Density", Part Description="40V 200mA PNP General Purpose Transistor", Part Number=MMBT3906LT1G, Pin Count=3, PressFit=No, Sense=No, SMD=Yes, Socket=No
U8: library part 24AA01H, "1K I2  C™ Serial EEPROM with Half-Array Write-Protect", Manufacturer=Microchip, Manufacturer Part Number=-, Supplier Part Number 1=579-24AA01HTILT, Generic=no, Mounting type=SMT, Package=-, Remarks=-, Supplier 1=Mouser, Supplier 2=Farnell, Supplier 3=Digikey, Supplier Part Number 2=-, Supplier Part Number 3=24AA01HT-I/LTCT-ND

## Free pads (board coordinates)
  round 196.85 hole 129.92: 0(0,0) 1(2913.39,0) 2(2915.75,925.59) 3(0,925.59) 6(1338.58,0) 7(1338.58,925.2) 8(1577.17,0) 9(1576.77,925.59)
  round 236.22 hole 129.92: 4(646.46,355.51) 5(650.39,820.08)

## Via types
v1: diameter 27.56, hole 11.81, Top Layer to Bottom Layer, tented both sides, 283 vias
v2: diameter 23.62, hole 11.81, Top Layer to Bottom Layer, tented both sides, 39 vias

## Nets (pads, with @x,y where several pads share a name; then routed paths per layer and width w, separated by ;. In a path a pad name is that pad's centre, name@x,y a point inside that pad or via, vN(x,y) a via of type N, cw(c..) or ccw(c..) an arc to the next point about the centre after c; other vN are vias at no path point)
ALERT: IC7.6 P6.5 R36.2 | length 681.6
  Top Layer w11.81: IC7.6@185.04,167.72 185.04,145.67 192.79,137.92 267.59,137.92 295.28,110.24 295.28,78.74 v2(330.71,78.74) ; v2(698.03,5.12) 698.03,-1.18 P6.5@724.41,-27.56
  Bottom Layer w11.81: v2(330.71,78.74) 669.29,78.74 698.03,50 v2(698.03,5.12)
FWD_Q: P3.6 R25.1 R37.1 R38.1 R39.1 | length 1494.4
  Top Layer w8: R25.1@2562.99,59.06 2562.99,59.45 2580.32,76.78 2590.74,76.78 2596.39,82.44 2596.39,104.28 2606.33,114.22 2607.12,114.22 2614.54,121.64 R38.1
  Top Layer w11.81: R37.1@1555.12,133.86 1582.68,133.86 1590.55,141.73 1590.55,153.01 1600.93,163.39 1612.2,163.39 1629.92,181.1 v2(1629.92,204.72) ; v2(2075.98,205.91) 2089.37,205.91 2099.61,195.67 P3.6 v2(2099.61,69.68) ; v2(2562.99,27.56) R25.1@2562.99,59.06
  Bottom Layer w11.81: v2(1629.92,204.72) 1629.92,228.35 1673.23,271.65 2010.24,271.65 v2(2075.98,205.91) ; v2(2099.61,69.68) 2150.79,69.68 2169.29,51.18 2169.29,-3.94 2216.54,-51.18 2314.96,-51.18 2393.7,27.56 v2(2562.99,27.56)
FWD_RST: P3.4 R2.2 R7.2 | length 1425
  Top Layer w11.81: R2.2@1736.22,311.02 v2(1767.72,311.02) ; 2775.59,216.54 v2(2805.12,216.54)
  Top Layer w19.68: v2(2137.8,208.66) 2185.04,208.66 2200.79,192.91 P3.4@2200.79,162.6
  Bottom Layer w11.81: v2(1767.72,311.02) 1779.53,299.21 2047.24,299.21 v2(2137.8,208.66) 2145.67,200.79 2344.54,200.79 2350.64,194.69 2428.88,194.69 2434.98,200.79 2464.57,200.79 2480.32,185.04 2480.32,157.48 2500,137.8 2586.61,137.8 2606.3,157.48 2606.3,240.16 2633.86,267.72 2771.65,267.72 2805.12,234.25 v2(2805.12,216.54)
FWD_VREF: P3.1 R20.1 R24.1 | length 1346.8
  Top Layer w11.81: v2(1736.22,188.98) R24.1@1736.22,224.41 ; v2(2673.23,236.22) 2673.23,240.16 R20.1@2685.04,251.97
  Top Layer w19.68: v2(2275.98,3.54) 2275.98,-8.27 P3.1@2299.21,-31.5
  Bottom Layer w11.81: v2(1736.22,188.98) 1767.72,157.48 2051.18,157.48 2059.06,165.35 2252.92,165.35 2287.4,130.87 2287.4,110.24 ; v2(2275.98,3.54) 2275.98,16.54 2287.4,27.95 2287.4,110.24 ; v2(2673.23,236.22) 2651.47,236.22 2629.92,214.67 2629.92,145.21 2594.95,110.24 2492.13,110.24 2427.49,174.87 2352.03,174.87 2287.4,110.24
FWD_VRMS: P3.5 R17.2 R42.1 | length 677.4
  Top Layer w11.81: R17.2@1887.74,-62.76 1893.94,-56.56 R17.2@1897.51,-60.13 ; R17.2 R17.2@1897.51,-60.13 ; P3.5 2099.61,8.66 2098.43,9.84 ; R42.1@2366.14,-59.06 2366.14,-17.12 2346.46,2.56 2346.46,19.68 2330.71,35.43 2181.1,35.43 2155.51,9.84 2098.43,9.84 ; R17.2@1897.51,-60.13 1902.15,-55.49 1923.07,-55.49 1927.51,-51.06 1929.79,-51.06 1964.08,-16.77 1964.08,-2.94 1976.86,9.84 2098.43,9.84
  Top Layer w19.68: P3.5@2099.61,-59.06 P3.5
GND: C2.1 C3.1 C4.1 C5.1 C6.1 C7.1 C8.1 C13.1 C14.1 C17.1 C20.2 C21.1 C23.2 C24.1 C25.1 C26.1 C27.1 C29.1 C30.1 C35.1 C36.1 C37.1 D1.1 D4.2 IC1.9 IC2.2 IC2.3 IC2.6 IC2.7 IC3.11 IC3.17 IC4.11 IC4.17 IC5.2 IC6.2 IC7.2 IC7.7 J2.2 P3.3 P3.7 P4.1 P5.1 P6.7 pad.0 pad.1 pad.2 pad.3 pad.4 pad.5 pad.6 pad.7 pad.8 pad.9 R9.1 R13.1 R14.1 R15.1 R16.1 R21.1 R28.2 R31.1 R32.1 R40.2 T2.1 T2.3 U8.2 U8.5 | length 981.6
  Top Layer w8: 1962.93,79.7 1966.81,75.83 2001.73,75.83 v1(2007.87,69.68) ; v1(2480.31,-5.21) C20.2@2480.32,31.5 ; IC3.11@2537.4,135.83 IC3.17@2537.4,183.07 ; 2864.17,285.43 2867.92,289.18 2867.92,299.32 J2.2@2893.7,325.1
  Top Layer w15.75: IC7.2 393.7,204.72 458.66,269.68 458.66,322.83 492.13,322.83 496.06,326.77 T2.1@496.06,401.57 ; C17.1@1452.76,366.14 1456.69,362.2 v2(1492.13,362.2) ; 1711.83,-66.74 R32.1@1711.83,-9.65 ; R9.1@1733.49,355.51 1738.61,350.39 v2(1765.37,350.39) ; v1(1850.39,226.38) 1860.24,216.54 ; v1@1948.82,195.67 v1(1947.83,194.69) v1(1947.83,95.73) 1947.83,94.8 1962.93,79.7 ; C14.1@2377.95,185.04 2377.95,216.54 v2(2381.89,220.47) ; IC3.17 IC3.17@2537.4,183.07 ; IC5.2@2637.8,27.56 2669.07,27.56 2687.01,45.5 v2(2686.88,45.5) ; C21.1@2775.59,137.8 2804.72,137.8 v1(2805.12,138.19) ; C26.1@2779.53,62.99 2801.18,62.99 v2(2814.96,76.77)
  other v1: 196.85,-78.74 314.96,-78.74 433.07,-78.74 551.18,-78.74 1938.98,-78.74 2779.53,-66.93 1023.62,157.48 1141.73,157.48 1259.84,157.48 1377.95,157.48 2913.38,157.48 244.09,173.23 2511.81,173.23 2543.31,173.23 244.09,204.72 2511.81,204.72 2543.31,204.72 1807.09,220.47 244.09,236.22 2318.9,255.91 964.57,275.59 1082.68,275.59 1200.79,275.59 1318.9,275.59 1555.12,279.53 1586.61,279.53 2157.48,279.53 2893.7,287.58 1555.12,311.02 1586.61,311.02 2157.48,318.9 1868.11,344.49 1271.65,358.27 1350.39,358.27 2157.48,358.27 2314.96,377.95 2393.7,377.95 2629.92,381.89 2704.72,389.76 2783.46,389.76 2862.2,389.76 2940.94,389.76 1023.62,393.7 1141.73,393.7 1259.84,393.7 1968.5,393.7 2086.61,393.7 1803.15,397.64 1881.89,397.64 2157.48,397.64 2590.55,413.39 2393.7,417.32 1551.18,421.26 2665.35,429.13 1271.65,437.01 1960.63,437.01 2039.37,437.01 2118.11,437.01 2157.48,437.01 2236.22,437.01 2314.96,437.01 -82.68,468.5 -43.31,468.5 -3.94,468.5 2586.61,468.5 2625.98,468.5 2118.11,476.38 2157.48,476.38 956.69,496.06 1035.43,496.06 1114.17,496.06 1192.91,496.06 1271.65,496.06 600.39,501.97 629.92,501.97 669.29,501.97 698.82,501.97 80.74,507.3 147.67,507.3 281.53,507.3 -82.68,507.87 -43.31,507.87 -3.94,507.87 208.66,507.87 1082.68,511.81 2618.11,511.81 2118.11,515.75 2157.48,515.75 610.24,531.5 649.61,531.5 688.98,531.5 2785.2,546.3 2862.2,547.24 2940.94,547.24 2650.77,554.37 1429.13,555.12 1507.87,555.12 1665.35,555.12 1744.09,555.12 2118.11,555.12 2157.48,555.12 610.24,561.02 649.61,561.02 688.98,561.02 1271.65,574.8 610.24,590.55 649.61,590.55 688.98,590.55 1350.39,594.49 1783.46,594.49 2118.11,594.49 2157.48,594.49 2393.7,598.43 2551.18,598.43 2785.2,613.23 610.24,620.08 649.61,620.08 688.98,620.08 2650.77,621.3 1346.32,633.57 1413.25,633.57 1480.18,633.57 1547.11,633.57 1614.03,633.57 1680.96,633.57 1862.2,633.86 1921.26,633.86 2078.74,633.86 2118.11,633.86 2157.48,633.86 2196.85,633.86 2393.7,633.86 998.11,639.34 1747.64,639.34 -82.68,641.73 -43.31,641.73 -3.94,641.73 76.17,642.31 143.1,642.31 210.03,642.31 276.96,642.31 2464.57,645.67 2582.68,645.67 610.24,649.61 649.61,649.61 688.98,649.61 941.02,651.16 1035.43,653.54 1107.85,653.54 367,662.52 1921.26,673.23 2078.74,673.23 2118.11,673.23 2157.48,673.23 2196.85,673.23 2393.7,673.23 600.39,679.13 629.92,679.13 669.29,679.13 698.82,679.13 2785.2,680.15 -82.68,681.1 -43.31,681.1 -3.94,681.1 1795.59,686.04 2650.77,688.23 2527.56,692.91 383.18,694.71 490.83,694.61 1862.2,712.6 1921.26,712.6 2078.74,712.6 2118.11,712.6 2157.48,712.6 2196.85,712.6 2393.7,712.6 2582.68,724.41 1016.81,732.28 1114.17,732.28 1192.91,732.28 792.63,744.68 1823.12,747.05 2785.2,747.08 19.68,748.03 137.79,748.03 255.9,748.03 964.57,748.03 1082.68,748.03 1909.45,748.03 2854.33,748.03 2972.44,748.03 2118.11,751.97 2157.48,751.97 490.83,761.54 383.18,761.64 2385.83,763.78 2464.57,763.78 2543.31,763.78 2622.05,763.78 1244.09,767.72 1313.31,768.01 1380.24,768.01 1447.17,768.01 1514.09,768.01 1581.02,768.01 1647.95,768.01 1956.69,767.72 2023.62,767.72 2244.09,767.72 2311.02,767.72 1885.32,771.76 900.28,787.88 2118.11,791.34 2157.48,791.34 792.63,811.61 2784.96,814.01 1689.75,820.28 1452.76,826.77 490.83,828.47 383.18,828.57 2118.11,830.71 2157.48,830.71 900.28,854.81 196.85,866.14 314.96,866.14 1023.62,866.14 1141.73,866.14 2795.27,866.14 2118.11,870.08 2157.48,870.08 1733.46,870.96 792.63,878.54 383.98,895.49 492.25,895.38 1790.37,906.19 1857.3,906.19 2422.19,906.19 2489.11,906.19 2556.04,906.19 2622.97,906.19 2689.9,906.19 2068.3,908.58 2118.11,909.45 2157.48,909.45 1925.2,915.35 1993.68,915.35 2234.23,915.35 2283.06,915.35 2358.27,915.35 895.3,921.55 549.27,930.43 750.06,930.18 2118.11,948.82 2157.48,948.82 403.22,959.6 865.29,981.38 141.73,984.25 259.84,984.25 377.95,984.25 968.5,984.25 1086.61,984.25 1204.72,984.25 1452.76,984.25 1688.98,984.25 1807.09,984.25 1925.2,984.25 2043.31,984.25 2240.16,984.25 2358.27,984.25 2476.38,984.25 2594.49,984.25 2712.6,984.25 447.9,1009.43
  other v2: 2153.54,-90.55 2244.09,-90.55 2208.66,3.94 385.83,330.71 1645.67,397.64 1724.41,413.38 1409.45,421.26 1472.44,421.26
NetC1_1: C1.1 R5.2 | length 922
  Top Layer w39.37: R5.2@437.01,685.04 437.01,884.25 cw(c537.01,884.25) 537.01,984.25 746.46,984.25 cw(c746.46,884.25) 846.46,884.25 C1.1@846.46,685.04
NetC1_2: C1.2 D3.3 IC1.6 IC1.7 L3.1 L6.1 | length 169.3
  Top Layer w66.93: 775.59,578.88 850.39,578.88 D3.3@944.88,578.88
NetC2_2: C2.2 R1.1 R4.1 | length 197.5
  Top Layer w19.68: R1.1 279.72,341.34 282.99,344.61 332.8,344.61 347.44,359.25 349.41,359.25 C2.2 ; C2.2@357.28,369.09 358.27,370.08 R4.1
NetC3_2: C3.2 C4.2 L2.1 R4.2 | length 242.8
  Top Layer w15.75: C4.2 287.4,413.39 287.68,413.39 326.77,452.48 326.77,452.76 350.39,476.38 R4.2 358.66,475.98 L2.1@432.93,475.98
NetC9_1: C9.1 L7.2 | length 59.4
  Top Layer w31.5: L7.2@1169.15,642.13 1227.95,642.13 C9.1@1228.35,641.73
NetC9_2: C9.2 C37.2 IC2.8 | length 59.1
  Top Layer w39.37: C9.2@1291.34,641.73 C37.2@1291.34,700.79
NetC10_1: C10.1 R10.2 R14.2 | length 77.5
  Top Layer w39.37: C10.1@2446.17,539.37 R14.2@2492.13,539.37 ; R10.2@2500,503.94 R14.2@2500,535.43
NetC10_2: C10.2 IC2.4 | length 90.6
  Top Layer w31.5: IC2.4@2283.06,538.98 2283.06,539.37 C10.2@2373.28,539.37
NetC11_1: C11.1 R11.1 R15.2 | length 126
  Top Layer w31.5: R11.1@1751.97,476.38 1803.15,476.38 C11.1
NetC11_2: C11.2 IC2.5 | length 118.5
  Top Layer w31.5: C11.2 1996.06,539.37 IC2.5@1996.06,538.98
NetC12_1: C12.1 J2.1
NetC12_2: C12.2 IC2.1
NetC15_1: C15.1 IC3.1 | length 67.4
  Top Layer w11.81: IC3.1@2557.09,250 2557.09,277.56 2562.99,283.46 C15.1
NetC15_2: C15.2 R10.1 R13.2 | length 118.1
  Top Layer w31.5: C15.2 R13.2 R10.1
NetC16_1: C16.1 IC4.1 | length 46.1
  Top Layer w11.81: C16.1@1598.43,401.57 1600.39,399.61 IC4.1@1600.39,356.3
NetC16_2: C16.2 R11.2 R16.2 | length 83.3
  Top Layer w39.37: C16.2@1593.8,476.63 1644.18,476.63 R11.2@1677.09,476.63
NetC19_1: C19.1 IC3.9 | length 63.5
  Top Layer w11.81: C19.1@2492.13,74.8 2498.03,80.71 IC3.9@2498.03,135.83
NetC19_2: C19.2 IC3.4 R26.1 | length 431
  Top Layer w11.81: C19.2@2444.88,74.8 2400.33,74.8 2400.33,95.73 2385.83,110.24 2366.14,110.24 2346.46,129.92 2346.46,236.22 2381.89,271.65 2490.16,271.65 2498.03,263.78 2498.03,250 IC3.4@2498.03,242.13
NetC20_1: C20.1 R26.2 | length 31.5
  Top Layer w11.81: R26.2@2409.45,31.5 C20.1@2440.94,31.5
NetC21_2: C21.2 IC5.5 L1.1 | length 246.1
  Top Layer w11.81: IC5.5@2732.28,64.96 2738.19,70.87 2738.19,98.43 ; C21.2@2736.22,137.8 2736.22,119.35 2738.19,117.38 2738.19,98.43 ; L1.1@2854.33,167.32 2854.33,124.01 2836.61,106.3 2802.73,106.3 2794.86,98.43 2738.19,98.43
NetC22_1: C22.1 IC4.9 | length 101.7